# Altium PCB l297_l298.PcbDoc
Units mm, origin at the board's own origin, x right, y up, seen from the top; angles counter-clockwise.
Board outline 152.4 x 101.6 mm, 2 copper layers (Top Layer, Bottom Layer); 23 components, 24 nets, 87 pads, 6 vias.
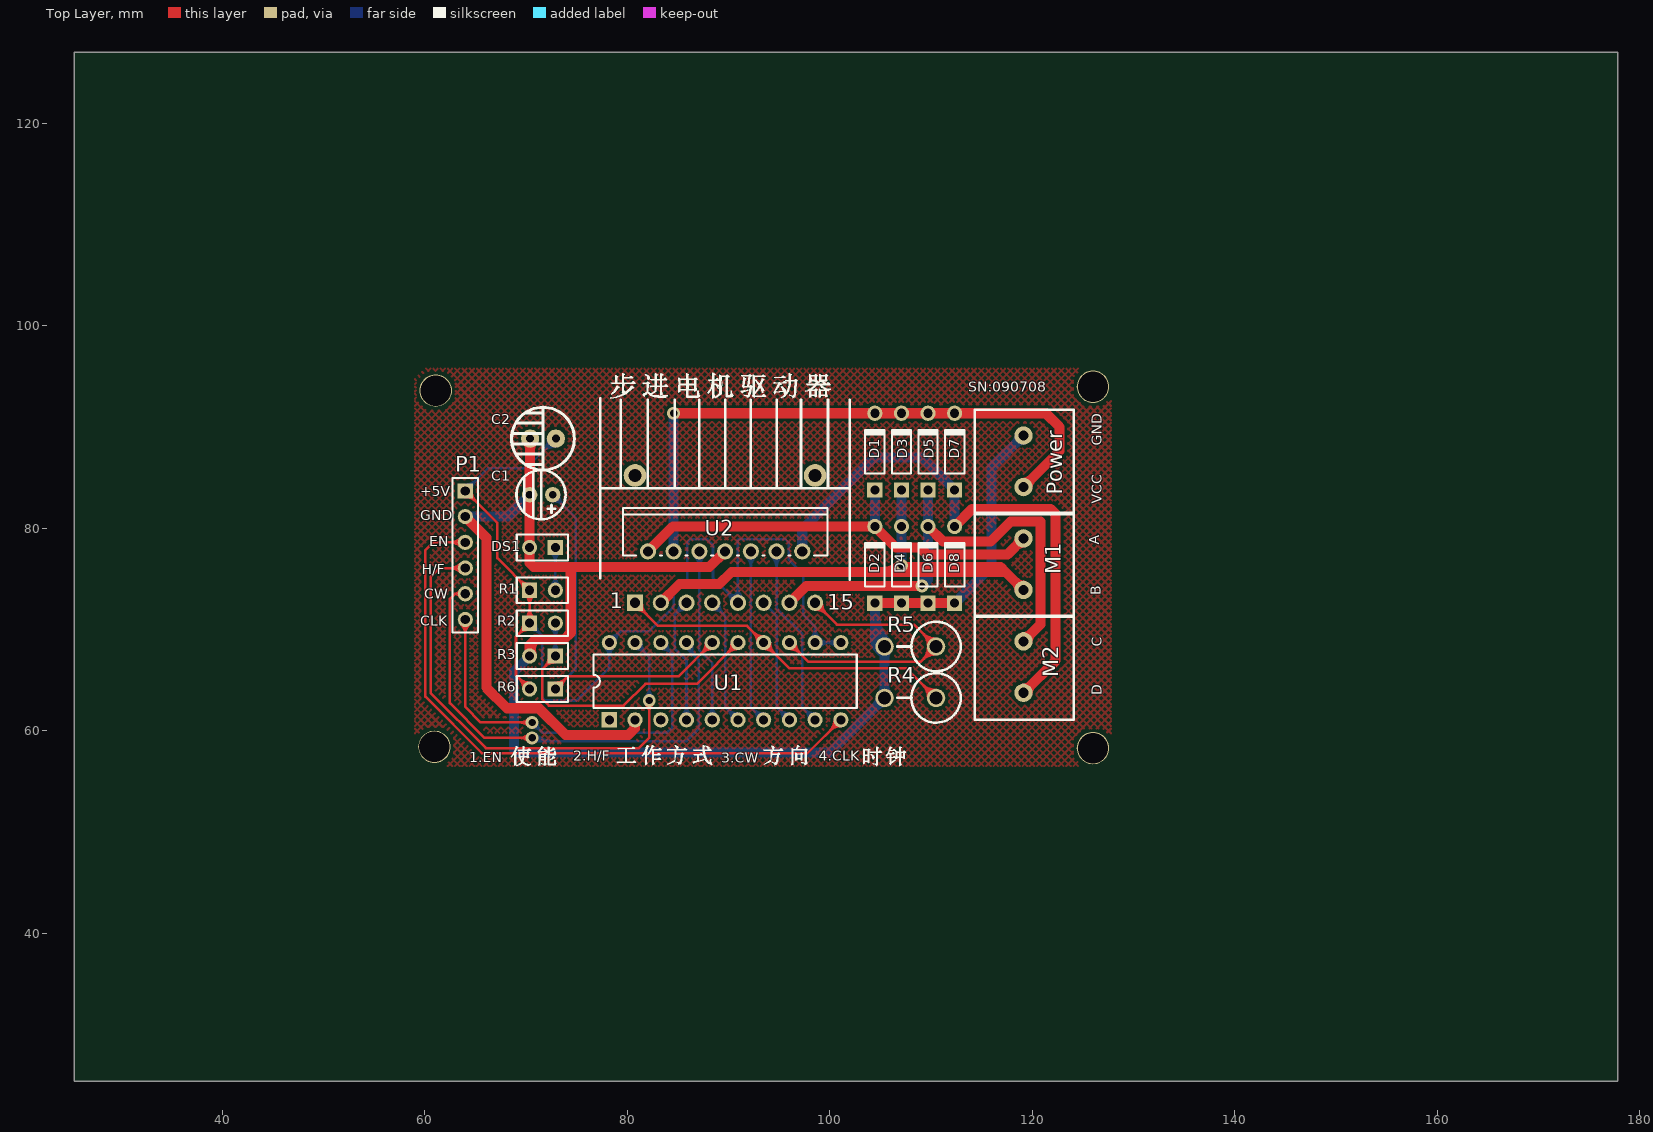
[diagram p0: Top Layer view]
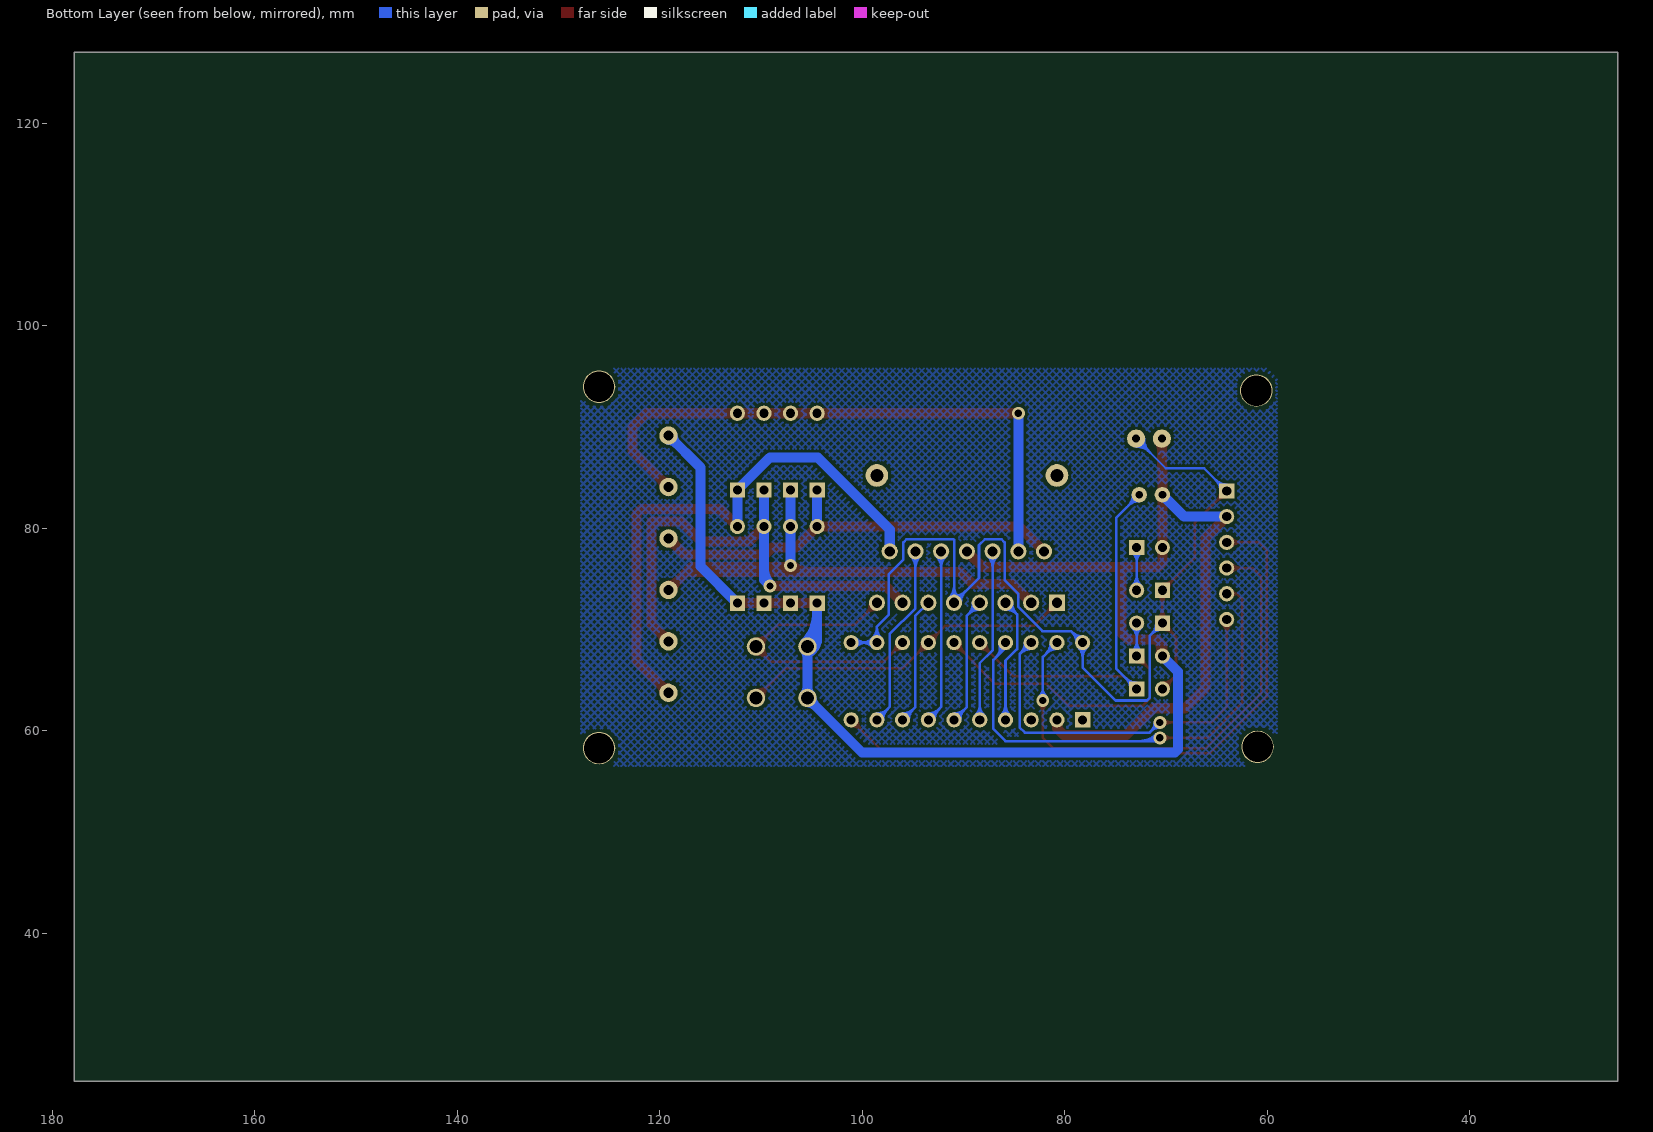
[diagram p1: Bottom Layer view, seen from below]

## Layer stack, top to bottom
Top Layer: signal copper 0.0356
Dielectric: dielectric 0.32, FR-4, Dk 4.8
Bottom Layer: signal copper 0.0356

## Board outline
25.4,25.4 177.8,25.4 177.8,127 25.4,127

## Design rules (kind name [scope] priority, off if disabled: settings)
Clearance [All] p1: gap=0.254
ComponentClearance [All] p1: gap=0.254 collisioncheckmode=3 verticalgap=0.254
PolygonConnect [All] p1: connectstyle=Relief reliefconductorwidth=0.254 reliefentries=4 polygonreliefangle="90 Angle"
RoutingVias [All] p1: holewidth=0.711 width=1.27 viastyle="Through Hole" minholewidth=0.711 minwidth=1.27 maxholewidth=0.711 maxwidth=1.27
SolderMaskExpansion [All] p1: expansion=0.102
TestPointUsage [All] p1: valid=0 allowmultiple=FALSE
Testpoint [All] p1: side=15 testpointundercomponent=TRUE minsize=1.016 maxsize=2.54 preferedsize=1.524 minholesize=0 maxholesize=1.016 preferedholesize=0.813 testpointgrid=0.025 style=1023 order=0123456789
Width NetD7_1 [InNet('NetD7_1')] p1: maxlimit=1 minlimit=1 preferedwidth=1
Width NetD5_1 [InNet('NetD5_1')] p2: maxlimit=1 minlimit=1 preferedwidth=1
Width NetD3_1 [InNet('NetD3_1')] p3: maxlimit=1 minlimit=1 preferedwidth=1
Width NetD1_1 [InNet('NetD1_1')] p4: maxlimit=1 minlimit=1 preferedwidth=1
Width VCC [InNet('VCC')] p5: maxlimit=1 minlimit=1 preferedwidth=1
Width GNE [InNet('GND')] p6: maxlimit=1 minlimit=1 preferedwidth=1
Width [All] p7: maxlimit=0.254 minlimit=0.254 preferedwidth=0.254
17 further rules are at their usual default settings.

## Components (designator, comment, footprint, x,y, rotation, side; value= is the part's Value field where it differs from the comment)
C1 "" C-DJ-4 70.231,85.852 r180 top
C2 "" C-DJ-6 70.358,88.773 r180 top
D1 "1N4007" D-ZL-10 104.394,91.313 r90 top
D2 "1N4007" D-ZL-10 104.394,80.137 r90 top
D3 "1N4007" D-ZL-10 107.022,91.313 r90 top
D4 "1N4007" D-ZL-10 107.022,80.137 r90 top
D5 "1N4007" D-ZL-10 109.649,91.313 r90 top
D6 "1N4007" D-ZL-10 109.649,80.137 r90 top
D7 "1N4007" D-ZL-10 112.277,91.313 r90 top
D8 "1N4007" D-ZL-10 112.277,80.137 r90 top
DS1 "LED" CPDR 71.628,78.105 r180 top
M1 "" JK128_2 120.269,78.486 r0 top
M2 "" JK128_2 120.269,68.326 r0 top
P1 "Header 6" HDR1X6 64.008,83.693 r270 top
Power "" JK128_2 120.269,88.646 r0 top
R1 "Res" CPDR 71.628,73.879 r0 top
R2 "Res" CPDR 71.628,70.631 r0 top
R3 "Res" CPDR 71.628,67.383 r180 top
R4 "" ZCDZl 107.95,60.706 r270 top
R5 "" ZCDZl 107.95,65.786 r270 top
R6 "Res" CPDR 71.628,64.135 r180 top
U1 "L297A" DIP-20 89.662,64.897 r0 top
U2 "L298N" L298N 89.662,77.597 r0 top

## Footprints (in the part's own frame and the unit in brackets; to place one, negate y for a bottom-side part, rotate by r counter-clockwise, add the part's x,y. Pads: shape width x height; smd on the part's side, far side on the other; paste and mask are expansions set on the pad)
C-DJ-4 [mil] "电容4mm"
  round 60 hole 30: 1(-95,100) 2(-5,100)
  silkscreen extent -145,5 46,195
C-DJ-6 [mm] "电容6mm"
  round 1.8 hole 0.8: 1(-2.591,-0.076) 2(-0.051,-0.076)
  silkscreen extent -4.42,-3.18 1.78,3.02
CPDR [mm] "瓷片电容"
  rect 1.5x1.5 hole 0.9: 1(-1.27,0)
  round 1.5 hole 0.9: 2(1.27,0)
  silkscreen extent -2.54,-1.27 2.54,1.27
D-ZL-10 [mm] "整流二极管"
  rect 1.5x1.5 hole 0.9: 1(-7.532,-0.051)
  round 1.5 hole 0.9: 2(0.048,-0.051)
  silkscreen extent -5.89,-1 -1.5,0.9
DIP-20 [mm] "直插20管脚"
  rect 1.5x1.5 hole 0.9: 1(-11.43,-3.81)
  round 1.5 hole 0.9: 2(-8.89,-3.81) 3(-6.35,-3.81) 4(-3.81,-3.81) 5(-1.27,-3.81) 6(1.27,-3.81) 7(3.81,-3.81) 8(6.35,-3.81) 9(8.89,-3.81) 10(11.43,-3.81) 11(11.43,3.81) 12(8.89,3.81) 13(6.35,3.81) 14(3.81,3.81) 15(1.27,3.81) 16(-1.27,3.81) 17(-3.81,3.81) 18(-6.35,3.81) 19(-8.89,3.81) 20(-11.43,3.81)
  silkscreen extent -13,-2.65 13,2.65
HDR1X6 [mm] "Connector; Header; 6 Position"
  rect 1.5x1.5 hole 0.9: 1(0,0)
  round 1.5 hole 0.9: 2(2.54,0) 3(5.08,0) 4(7.62,0) 5(10.16,0) 6(12.7,0)
  silkscreen extent -1.27,-1.27 13.97,1.27
JK128_2 [mil] "接线端子"
  round 71.81 hole 39.37: 1(-45,20) 2(-45,-180)
  silkscreen extent -235,-285 150,120
L298N [mm] "直流/步进两用驱动器"
  round 2.24 hole 1.262: 0(-8.89,7.62) 0(8.89,7.62)
  rect 1.6x1.6 hole 1: 1(-8.89,-4.953)
  round 1.6 hole 1: 2(-7.62,0.127) 3(-6.35,-4.953) 4(-5.08,0.127) 5(-3.81,-4.953) 6(-2.54,0.127) 7(-1.27,-4.953) 8(0,0.127) 9(1.27,-4.953) 10(2.54,0.127) 11(3.81,-4.953) 12(5.08,0.127) 13(6.35,-4.953) 14(7.62,0.127) 15(8.89,-4.953)
  silkscreen extent -12.32,-2.67 12.32,15.24
ZCDZl [mm] "直插电阻立式插"
  round 1.824 hole 1.262: 1(-2.54,2.54) 2(-2.54,-2.54)
  silkscreen extent -4.98,-1.27 -0.1,4.98

## Part data
C1: library part Cap, "Capacitor"
C2: library part "Cap Pol3", "Polarized Capacitor (Surface Mount)"
D1 D2 D3 D4 D5 D6 D7 D8: library part "Diode 1N4007", "1 Amp General Purpose Rectifier"
DS1: "发光二极管"
M1 M2 Power: library part MHDR1X2, "Header, 2-Pin"
P1: "Header, 6-Pin"
R1 R2 R3 R6: "电阻"
R4 R5: library part Res, "电阻"
U1: "Stepper Motor Controller"
U2: "Dual Full Bridge Driver"

## Free pads (board coordinates)
  round 3.2 hole 3: 0(61.087,93.599) 1(60.96,58.42) 2(125.984,58.293) 3(125.984,93.98)

## Via types
v1: diameter 1.27, hole 0.711, Top Layer to Bottom Layer, 6 vias

## Nets (pads, with @x,y where several pads share a name; then routed paths per layer and width w, separated by ;. In a path a pad name is that pad's centre, name@x,y a point inside that pad or via, vN(x,y) a via of type N, cw(c..) or ccw(c..) an arc to the next point about the centre after c; other vN are vias at no path point)
ENA: R4.1 U1.14 U2.1 | length 50.3
  Top Layer w0.254: U2.1@80.772,71.971 cw(c80.772,70.346) 81.921,71.495 cw(c83.07,72.644) U2.1@81.445,72.644 ; U2.1@80.772,72.225 cw(c80.772,71.213) 81.487,71.929 cw(c82.203,72.644) U2.1@81.191,72.644 ; U2.1 83.058,70.358 91.821,70.358 U1.14 96.012,66.167 107.569,66.167 R4.1 ; U1.14@92.849,68.707 ccw(c91.345,68.707) 92.408,69.771 ccw(c93.472,70.834) U1.14@93.472,69.33 ; U1.14@93.103,68.707 ccw(c92.212,68.707) 92.842,69.337 ccw(c93.472,69.967) U1.14@93.472,69.076 ; U1.14@93.472,68.084 cw(c93.472,66.58) 94.536,67.643 cw(c95.599,68.707) U1.14@94.095,68.707 ; U1.14@93.472,68.338 cw(c93.472,67.447) 94.102,68.077 cw(c94.732,68.707) U1.14@93.841,68.707 ; R4.1@109.705,63.246 ccw(c107.81,63.246) 109.15,64.586 ccw(c110.49,65.926) R4.1@110.49,64.031 ; R4.1@109.959,63.246 ccw(c108.677,63.246) 109.584,64.152 ccw(c110.49,65.059) R4.1@110.49,63.777
ENB: R5.1 U1.13 U2.15 | length 47.5
  Top Layer w0.254: U1.13@96.012,68.084 cw(c96.012,66.58) 97.076,67.643 cw(c98.139,68.707) U1.13@96.635,68.707 ; U1.13@96.012,68.338 cw(c96.012,67.447) 96.642,68.077 cw(c97.272,68.707) U1.13@96.381,68.707 ; U1.13 97.917,66.802 108.966,66.802 R5.1 108.331,70.485 100.711,70.485 U2.15 ; U2.15@98.552,71.971 cw(c98.552,70.346) 99.701,71.495 cw(c100.85,72.644) U2.15@99.225,72.644 ; U2.15@98.552,72.225 cw(c98.552,71.213) 99.267,71.929 cw(c99.983,72.644) U2.15@98.971,72.644 ; R5.1@110.49,67.541 ccw(c110.49,65.646) 109.15,66.986 ccw(c107.81,68.326) 109.705,68.326 ccw(c107.81,68.326) 109.15,69.666 ccw(c110.49,71.006) R5.1@110.49,69.111 ; R5.1@110.49,67.795 ccw(c110.49,66.513) 109.584,67.42 ccw(c108.677,68.326) 109.959,68.326 ccw(c108.677,68.326) 109.584,69.232 ccw(c110.49,70.139) R5.1@110.49,68.857
GND: C1.2 C2.2 D2.1 D4.1 D6.1 D8.1 DS1.2 P1.2 Power.1 R3.2 R4.2 R5.2 U1.2 U2.8 | length 189.9
  Top Layer w1: P1.2 66.091,79.07 66.091,64.262 68.123,62.23 71.271,62.23 73.918,59.583 80.106,59.583 80.772,60.249 U1.2 ; C2.2@70.126,88.566 cw(c69.443,87.884) 70.409,87.884 cw(c71.374,87.884) C2.2@70.692,88.566 ; R3.2 70.358,68.478 70.891,69.012 ; C2.2 70.409,86.106 70.358,86.055 C1.2 DS1.2 70.358,76.581 70.769,76.17 88.108,76.17 U2.8 ; R3.2@70.589,67.479 cw(c71.883,68.02) 70.891,69.012 ; 74.422,76.17 74.422,69.672 73.762,69.012 70.891,69.012 ; 80.525,60.002 ccw(c80.032,60.495) U1.2@80.577,60.931 ; D2.1 D4.1 D6.1 D8.1
  Bottom Layer w1: P1.2 68.199,81.153 C1.2 ; R3.2 68.834,65.859 68.834,58.16 69.133,57.861 100.025,57.861 R4.2 R5.2 104.445,69.291 D2.1 ; 104.445,69.235 ccw(c106.319,69.235) R5.2@104.994,67.91 ; 104.445,71.65 ccw(c108.734,71.65) R5.2@105.701,68.617 ; R4.2@104.998,63.246 cw(c104.003,63.246) 104.707,62.543 cw(c105.41,61.839) R4.2@105.41,62.834 ; R5.2@104.998,68.326 ccw(c104.003,68.326) 104.707,69.029 ccw(c105.41,69.733) R5.2@105.41,68.738 ; R4.2@105.119,63.537 ccw(c104.415,64.241) 105.41,64.241 ccw(c106.405,64.241) R4.2@105.701,63.537 ; R5.2@105.119,68.035 cw(c104.415,67.331) 105.41,67.331 cw(c106.405,67.331) R5.2@105.701,68.035 ; D8.1 115.951,76.228 115.951,85.979 Power.1 ; Power.1@118.714,89.154 cw(c117.719,89.154) 118.423,88.451 cw(c119.126,87.747) Power.1@119.126,88.742
HOME: U1.3
NetC1_1: C1.1 R6.1 U1.16 | length 53.5
  Top Layer w0.254: R6.1 74.168,65.405 85.09,65.405 U1.16 ; R6.1@72.898,64.504 ccw(c72.898,65.395) 73.528,64.765 ccw(c74.158,64.135) R6.1@73.267,64.135 ; R6.1@72.898,64.758 ccw(c72.898,66.262) 73.962,65.199 ccw(c75.025,64.135) R6.1@73.521,64.135 ; U1.16@87.769,68.707 cw(c86.265,68.707) 87.328,67.643 cw(c88.392,66.58) U1.16@88.392,68.084 ; U1.16@88.023,68.707 cw(c87.132,68.707) 87.762,68.077 cw(c88.392,67.447) U1.16@88.392,68.338
  Bottom Layer w0.254: C1.1@72.644,82.677 cw(c72.644,81.144) 73.728,82.228 cw(c74.812,83.312) C1.1@73.279,83.312 ; C1.1@72.644,82.931 cw(c72.644,82.011) 73.294,82.662 cw(c73.945,83.312) C1.1@73.025,83.312 ; C1.1 74.93,81.026 74.93,66.167 R6.1 ; R6.1@72.898,64.504 ccw(c72.898,65.395) 73.528,64.765 ccw(c74.158,64.135) R6.1@73.267,64.135 ; R6.1@72.898,64.758 ccw(c72.898,66.262) 73.962,65.199 ccw(c75.025,64.135) R6.1@73.521,64.135
NetD1_1: D1.1 D2.2 M1.1 U2.2 | length 45.1
  Top Layer w1: U2.2 84.503,80.185 D2.2 106.526,78.105 108.897,78.105 109.575,77.427 117.559,77.427 M1.1 ; M1.1@118.714,78.994 cw(c117.719,78.994) 118.423,78.291 cw(c119.126,77.587) M1.1@119.126,78.582
  Bottom Layer w1: D2.2 D1.1
NetD3_1: D3.1 D4.2 M1.2 U2.3 | length 61.9
  Top Layer w1: U2.3 85.161,74.493 89.097,74.493 90.296,75.692 107.073,75.692 117.348,75.692 ; 105.243,75.692 ccw(c105.243,78.145) v1@106.978,76.41 ; v1(107.073,76.315) 107.215,76.173 116.867,76.173 117.348,75.692 ; 107.741,76.173 cw(c107.741,76.983) 107.168,76.41 ccw(c108.903,78.145) 108.903,75.692 ; M1.2@118.714,73.914 ccw(c117.719,73.914) 118.423,74.617 ccw(c119.126,75.321) M1.2@119.126,74.326 ; M1.2 117.348,75.692
  Bottom Layer w1: v1(107.073,76.315) D4.2 D3.1
NetD5_1: D5.1 D6.2 M2.1 U2.13 | length 52
  Top Layer w1: U2.13 97.663,74.295 v1(109.093,74.295) ; D6.2 111.205,78.681 115.868,78.681 117.847,80.66 120.792,80.66 120.802,80.65 120.802,70.51 M2.1 ; M2.1@119.126,69.246 ccw(c119.126,70.241) 119.829,69.537 ccw(c120.533,68.834) M2.1@119.538,68.834
  Bottom Layer w1: v1@108.998,74.39 ccw(c107.3,76.088) 109.701,76.088 ; v1(109.093,74.295) 109.701,74.903 D6.2 D5.1
NetD7_1: D7.1 D8.2 M2.2 U2.14 | length 56.5
  Top Layer w1: D8.2 114.057,81.914 121.794,81.914 122.301,81.407 122.301,66.929 M2.2 ; M2.2@119.126,64.166 ccw(c119.126,65.161) 119.829,64.457 ccw(c120.533,63.754) M2.2@119.538,63.754
  Bottom Layer w1: U2.14 97.282,79.883 104.394,86.995 109.114,86.995 D7.1 D8.2
NetDS1_1: DS1.1 R1.2 | length 11.7
  Bottom Layer w0.254: R1.2@72.457,74.32 ccw(c71.394,75.383) 72.898,75.383 ccw(c74.402,75.383) R1.2@73.339,74.32 ; DS1.1@72.457,77.664 cw(c71.394,76.601) 72.898,76.601 cw(c74.402,76.601) DS1.1@73.339,77.664 ; R1.2@72.637,74.14 ccw(c72.007,74.77) 72.898,74.77 ccw(c73.789,74.77) R1.2@73.159,74.14 ; DS1.1@72.637,77.844 cw(c72.007,77.214) 72.898,77.214 cw(c73.789,77.214) DS1.1@73.159,77.844 ; R1.2 DS1.1
NetR2_2: R2.2 R3.1 U1.15 | length 45.2
  Top Layer w0.254: R3.1@72.275,67.383 cw(c70.771,67.383) 71.834,66.319 cw(c72.898,65.256) R3.1@72.898,66.76 ; R3.1@72.529,67.383 cw(c71.638,67.383) 72.268,66.753 cw(c72.898,66.123) R3.1@72.898,67.014 ; R3.1 71.628,66.113 71.628,63.119 72.263,62.484 79.629,62.484 81.788,64.643 86.868,64.643 U1.15 ; U1.15@90.309,68.707 cw(c88.805,68.707) 89.868,67.643 cw(c90.932,66.58) U1.15@90.932,68.084 ; U1.15@90.563,68.707 cw(c89.672,68.707) 90.302,68.077 cw(c90.932,67.447) U1.15@90.932,68.338
  Bottom Layer w0.254: R3.1@72.457,67.824 ccw(c71.394,68.887) 72.898,68.887 ccw(c74.402,68.887) R3.1@73.339,67.824 ; R2.2@72.457,70.19 cw(c71.394,69.127) 72.898,69.127 cw(c74.402,69.127) R2.2@73.339,70.19 ; R3.1@72.637,67.644 ccw(c72.007,68.274) 72.898,68.274 ccw(c73.789,68.274) R3.1@73.159,67.644 ; R2.2@72.637,70.37 cw(c72.007,69.74) 72.898,69.74 cw(c73.789,69.74) R2.2@73.159,70.37 ; R3.1 R2.2
NetU1_4: U1.4 U2.5 | length 20.4
  Bottom Layer w0.254: U2.5@85.179,72.642 cw(c83.574,72.636) 84.709,71.501 ; U1.4@85.411,61.528 ccw(c84.348,62.591) 85.852,62.591 ccw(c87.356,62.591) U1.4@86.293,61.528 ; U2.5@85.433,72.642 cw(c84.434,72.639) 85.14,71.932 cw(c85.847,71.226) U2.5@85.85,72.225 ; U1.4@85.591,61.348 ccw(c84.961,61.978) 85.852,61.978 ccw(c86.743,61.978) U1.4@86.113,61.348 ; U2.5@85.85,71.971 ccw(c85.844,70.366) 84.709,71.501 ; U1.4 85.852,66.929 84.709,68.072 84.709,71.501 ; U2.5 84.709,71.501
NetU1_5: U1.5 U2.6 | length 25.1
  Bottom Layer w0.254: U2.6@86.646,77.248 cw(c85.497,76.099) 87.122,76.099 cw(c88.747,76.099) U2.6@87.598,77.248 ; U2.6@86.826,77.428 cw(c86.11,76.712) 87.122,76.712 cw(c88.134,76.712) U2.6@87.418,77.428 ; U2.6 87.122,67.945 88.392,66.675 U1.5 ; U1.5@87.951,61.528 ccw(c86.888,62.591) 88.392,62.591 ccw(c89.896,62.591) U1.5@88.833,61.528 ; U1.5@88.131,61.348 ccw(c87.501,61.978) 88.392,61.978 ccw(c89.283,61.978) U1.5@88.653,61.348
NetU1_6: U1.6 U2.7 | length 20.5
  Bottom Layer w0.254: U2.7@88.392,71.971 cw(c88.392,70.346) 89.541,71.495 cw(c90.69,72.644) U2.7@89.065,72.644 ; U2.7@88.392,72.225 cw(c88.392,71.213) 89.107,71.929 cw(c89.823,72.644) U2.7@88.811,72.644 ; U2.7 89.662,71.374 89.662,62.357 U1.6 ; U1.6@90.309,61.087 ccw(c88.805,61.087) 89.868,62.151 ccw(c90.932,63.214) U1.6@90.932,61.71 ; U1.6@90.563,61.087 ccw(c89.672,61.087) 90.302,61.717 ccw(c90.932,62.347) U1.6@90.932,61.456
NetU1_7: U1.7 U2.10 | length 25.1
  Bottom Layer w0.254: U2.10@91.726,77.248 cw(c90.577,76.099) 92.202,76.099 cw(c93.827,76.099) U2.10@92.678,77.248 ; U2.10@91.906,77.428 cw(c91.19,76.712) 92.202,76.712 cw(c93.214,76.712) U2.10@92.498,77.428 ; U2.10 92.202,62.357 U1.7 ; U1.7@92.849,61.087 ccw(c91.345,61.087) 92.408,62.151 ccw(c93.472,63.214) U1.7@93.472,61.71 ; U1.7@93.103,61.087 ccw(c92.212,61.087) 92.842,61.717 ccw(c93.472,62.347) U1.7@93.472,61.456
NetU1_8: U1.8 U2.11 | length 16.4
  Bottom Layer w0.254: U2.11 94.742,71.374 94.742,62.357 U1.8 ; U1.8@95.389,61.087 ccw(c93.885,61.087) 94.948,62.151 ccw(c96.012,63.214) U1.8@96.012,61.71 ; U1.8@95.643,61.087 ccw(c94.752,61.087) 95.382,61.717 ccw(c96.012,62.347) U1.8@96.012,61.456
NetU1_9: U1.9 U2.12 | length 26.1
  Bottom Layer w0.254: U2.12@94.266,77.248 cw(c93.117,76.099) 94.742,76.099 cw(c96.367,76.099) U2.12@95.218,77.248 ; U2.12@94.446,77.428 cw(c93.73,76.712) 94.742,76.712 cw(c95.754,76.712) U2.12@95.038,77.428 ; U2.12 94.742,72.098 97.282,69.558 97.282,62.357 U1.9 ; U1.9@97.929,61.087 ccw(c96.425,61.087) 97.488,62.151 ccw(c98.552,63.214) U1.9@98.552,61.71 ; U1.9@98.183,61.087 ccw(c97.292,61.087) 97.922,61.717 ccw(c98.552,62.347) U1.9@98.552,61.456
VCC: D1.2 D3.2 D5.2 D7.2 Power.2 U2.4 | length 61.3
  Top Layer w1: v1(84.582,91.361) D1.2 D3.2 D5.2 D7.2 121.333,91.361 122.682,90.012 122.682,87.63 Power.2 ; Power.2@119.126,84.486 ccw(c119.126,85.481) 119.829,84.777 ccw(c120.533,84.074) Power.2@119.538,84.074
  Bottom Layer w1: U2.4 v1(84.582,91.361)
使能: P1.3 U1.10 | length 71
  Top Layer w0.254: P1.3@63.567,78.172 ccw(c62.504,77.109) 62.504,78.613 ccw(c62.504,80.117) P1.3@63.567,79.054 ; P1.3@63.747,78.352 ccw(c63.117,77.722) 63.117,78.613 ccw(c63.117,79.504) P1.3@63.747,78.874 ; P1.3 60.833,78.613 60.071,77.851 60.071,63.373 65.659,57.785 97.79,57.785 U1.10 ; U1.10@100.469,61.087 cw(c98.965,61.087) 100.028,60.023 cw(c101.092,58.96) U1.10@101.092,60.464 ; U1.10@100.723,61.087 cw(c99.832,61.087) 100.462,60.457 cw(c101.092,59.827) U1.10@101.092,60.718
复位: C2.1 P1.1 R1.1 R2.1 R6.2 U1.11 U1.12 U1.20 U2.9 | length 164.1
  Top Layer w0.254: P1.1@64.008,83.07 cw(c64.008,81.566) 65.072,82.629 cw(c66.135,83.693) P1.1@64.631,83.693 ; P1.1@64.008,83.324 cw(c64.008,82.433) 64.638,83.063 cw(c65.268,83.693) P1.1@64.377,83.693 ; P1.1 67.183,80.518 67.183,77.054 R1.1 R2.1 69.012,69.285 69.012,65.481 R6.2 ; R6.2@69.735,64.135 ccw(c68.231,64.135) 69.294,65.199 ccw(c70.358,66.262) R6.2@70.358,64.758 ; R2.1@69.735,70.631 cw(c68.231,70.631) 69.294,69.567 cw(c70.358,68.504) R2.1@70.358,70.008 ; R1.1@69.735,73.879 ccw(c68.231,73.879) 69.294,74.943 ccw(c70.358,76.006) R1.1@70.358,74.502 ; R2.1@69.917,71.072 ccw(c68.854,72.135) 70.358,72.135 ccw(c71.862,72.135) R2.1@70.799,71.072 ; R1.1@69.917,73.438 cw(c68.854,72.375) 70.358,72.375 cw(c71.862,72.375) R1.1@70.799,73.438 ; R6.2@69.989,64.135 ccw(c69.098,64.135) 69.728,64.765 ccw(c70.358,65.395) R6.2@70.358,64.504 ; R2.1@69.989,70.631 cw(c69.098,70.631) 69.728,70.001 cw(c70.358,69.371) R2.1@70.358,70.262 ; R1.1@69.989,73.879 ccw(c69.098,73.879) 69.728,74.509 ccw(c70.358,75.139) R1.1@70.358,74.248 ; R2.1@70.097,70.892 ccw(c69.467,71.522) 70.358,71.522 ccw(c71.249,71.522) R2.1@70.619,70.892 ; R1.1@70.097,73.618 cw(c69.467,72.988) 70.358,72.988 cw(c71.249,72.988) R1.1@70.619,73.618
  Bottom Layer w0.254: P1.1 66.243,85.928 70.028,85.928 C2.1 ; P1.1@64.008,84.062 ccw(c64.008,84.953) 64.638,84.323 ccw(c65.268,83.693) P1.1@64.377,83.693 ; P1.1@64.008,84.316 ccw(c64.008,85.82) 65.072,84.757 ccw(c66.135,83.693) P1.1@64.631,83.693 ; R2.1@70.358,70.008 cw(c70.358,68.504) 71.422,69.567 cw(c72.485,70.631) R2.1@70.981,70.631 ; R2.1@70.358,70.262 cw(c70.358,69.371) 70.988,70.001 cw(c71.618,70.631) R2.1@70.727,70.631 ; R2.1 71.628,69.361 71.628,63.246 71.882,62.992 74.981,62.992 78.232,66.243 U1.20 79.375,69.85 82.194,69.85 84.582,72.238 84.582,73.533 85.928,74.879 85.928,78.613 86.233,78.918 87.884,78.918 88.468,78.334 88.468,75.108 U2.9 90.932,78.842 91.008,78.918 95.631,78.918 95.936,78.613 95.936,76.911 97.371,75.476 97.371,71.476 98.552,70.295 U1.12 U1.11 ; C2.1@72.176,88.849 cw(c70.31,88.849) 71.629,87.53 cw(c72.949,86.21) C2.1@72.949,88.076 ; C2.1@72.43,88.849 cw(c71.177,88.849) 72.063,87.963 cw(c72.949,87.077) C2.1@72.949,88.33 ; U1.20@77.791,68.266 cw(c76.728,67.203) 78.232,67.203 cw(c79.736,67.203) U1.20@78.673,68.266 ; U1.20@77.971,68.446 cw(c77.341,67.816) 78.232,67.816 cw(c79.123,67.816) U1.20@78.493,68.446 ; U1.20@78.232,69.076 ccw(c78.232,69.967) 78.862,69.337 ccw(c79.492,68.707) U1.20@78.601,68.707 ; U1.20@78.232,69.33 ccw(c78.232,70.834) 79.296,69.771 ccw(c80.359,68.707) U1.20@78.855,68.707 ; U2.9@90.259,72.644 ccw(c88.634,72.644) 89.783,73.793 ccw(c90.932,74.942) U2.9@90.932,73.317 ; U2.9@90.456,73.12 ccw(c89.307,74.269) 90.932,74.269 ccw(c92.557,74.269) U2.9@91.408,73.12 ; U2.9@90.513,72.644 ccw(c89.501,72.644) 90.217,73.359 ccw(c90.932,74.075) U2.9@90.932,73.063 ; U2.9@90.636,72.94 ccw(c89.92,73.656) 90.932,73.656 ccw(c91.944,73.656) U2.9@91.228,72.94 ; U1.12@98.111,69.148 ccw(c97.048,70.211) 98.552,70.211 ccw(c100.056,70.211) 98.993,69.148 ccw(c100.056,70.211) 100.056,68.707 ccw(c100.056,67.203) U1.12@98.993,68.266 ; U1.12@98.291,68.968 ccw(c97.661,69.598) 98.552,69.598 ccw(c99.443,69.598) 98.813,68.968 ccw(c99.443,69.598) 99.443,68.707 ccw(c99.443,67.816) U1.12@98.813,68.446 ; U1.11@100.651,68.266 ccw(c99.588,67.203) 99.588,68.707 ccw(c99.588,70.211) U1.11@100.651,69.148 ; U1.11@100.831,68.446 ccw(c100.201,67.816) 100.201,68.707 ccw(c100.201,69.598) U1.11@100.831,68.968
工作方式: P1.4 U1.19 | length 61
  Top Layer w0.254: P1.4@63.567,75.632 ccw(c62.504,74.569) 62.504,76.073 ccw(c62.504,77.577) P1.4@63.567,76.514 ; P1.4@63.747,75.812 ccw(c63.117,75.182) 63.117,76.073 ccw(c63.117,76.964) P1.4@63.747,76.334 ; P1.4 61.468,76.073 60.579,75.184 60.579,63.754 66.04,58.293 ; 66.167,58.293 66.04,58.293 ; v1@81.81,62.633 cw(c80.943,61.766) 82.169,61.766 cw(c83.395,61.766) v1@82.528,62.633 ; v1(82.169,62.992) 82.169,59.309 81.153,58.293 66.04,58.293
  Bottom Layer w0.254: U1.19@80.772,68.084 cw(c80.772,66.58) 81.836,67.643 cw(c82.899,68.707) U1.19@81.395,68.707 ; U1.19@80.772,68.338 cw(c80.772,67.447) 81.402,68.077 cw(c82.032,68.707) U1.19@81.141,68.707 ; U1.19 82.169,67.31 v1(82.169,62.992) ; v1@81.81,63.351 ccw(c80.943,64.218) 82.169,64.218 ccw(c83.395,64.218) v1@82.528,63.351
方向: P1.5 U1.17 | length 58.2
  Top Layer w0.254: P1.5@63.453,73.25 ccw(c62.992,73.016) 62.992,73.533 ; P1.5@63.453,73.816 cw(c62.992,74.05) 62.992,73.533 ; P1.5 62.992,73.533 ; v1@70.253,58.95 ccw(c69.386,58.083) 69.386,59.309 ccw(c69.386,60.535) v1@70.253,59.668 ; v1(70.612,59.309) 65.913,59.309 62.484,62.738 62.484,73.025 62.992,73.533
  Bottom Layer w0.254: v1@70.792,59.489 ccw(c71.997,60.694) 71.997,58.989 ; v1@70.971,59.668 ccw(c72.61,61.307) 72.61,58.989 ; 71.384,58.989 cw(c71.384,60.081) v1(70.612,59.309) 70.612,59.243 70.866,58.989 85.852,58.989 87.056,60.194 87.056,66.995 85.852,68.199 U1.17 ; U1.17@85.963,68.677 ccw(c86.77,68.462) 86.179,67.872 ; U1.17@86.209,68.612 ccw(c87.261,68.331) 86.491,67.56 ; U1.17@86.454,68.546 ccw(c87.753,68.199) 86.802,67.249
时钟: P1.6 U1.18 | length 50.6
  Top Layer w0.254: P1.6@63.567,70.552 cw(c62.504,69.489) 64.008,69.489 cw(c65.512,69.489) P1.6@64.449,70.552 ; P1.6@63.747,70.732 cw(c63.117,70.102) 64.008,70.102 cw(c64.899,70.102) P1.6@64.269,70.732 ; P1.6 64.008,62.357 65.532,60.833 v1(70.612,60.833) ; v1@70.253,60.474 ccw(c69.386,59.607) 69.386,60.833 ccw(c69.386,62.059) v1@70.253,61.192
  Bottom Layer w0.254: v1@70.612,60.325 cw(c70.612,59.099) 71.479,59.966 cw(c72.346,60.833) v1@71.12,60.833 ; v1(70.612,60.833) 71.628,59.817 83.947,59.817 84.455,60.325 84.455,67.564 U1.18 ; U1.18@83.312,68.084 cw(c83.312,66.58) 84.376,67.643 cw(c85.439,68.707) U1.18@83.935,68.707 ; U1.18@83.312,68.338 cw(c83.312,67.447) 83.942,68.077 cw(c84.572,68.707) U1.18@83.681,68.707
时钟输出: U1.1
pads on no net: U2.0

## Polygon pours and split planes (outlines as drawn)
no net on Top Layer (hatched 45Degree grid 0.508 track 0.203): 59.024,94.749 60.037,95.758 127.002,95.758 127.762,95.001 127.762,57.524 126.749,56.515 60.037,56.515 59.151,57.398 59.024,57.524
no net on Bottom Layer (hatched 45Degree grid 0.508 track 0.203): 59.055,94.745 60.071,95.758 127,95.758 127.762,94.998 127.762,57.528 126.746,56.515 60.198,56.515 59.055,57.654

## Silkscreen, mask and mechanical layers (free items; w line width, h text height)
Top Overlay:
  drawing of 2409 lines, arcs and shapes, not listed
  text "SN:090708" at 113.665,93.472 h1.02
  text "GND" at 126.873,88.138 h1.02 r90
  text "+5V" at 59.563,83.185 h1.02
  text "VCC" at 126.873,82.423 h1.02 r90
  text "GND" at 59.563,80.772 h1.02
  text "A" at 126.619,78.359 h1.02 r90
  text "EN" at 60.452,78.232 h1.02
  text "H/F" at 59.69,75.438 h1.02
  text "B" at 126.746,73.406 h1.02 r90
  text "CW" at 59.944,73.025 h1.02
  text "CLK" at 59.563,70.358 h1.02
  text "C" at 126.873,68.326 h1.02 r90
  text "D" at 126.873,63.5 h1.02 r90
  text "2.H/F" at 74.676,57.023 h1.02
  text "4.CLK" at 98.933,57.023 h1.02
  text "1.EN" at 64.389,56.921 h1.02
  text "3.CW" at 89.291,56.871 h1.02
Mechanical 1:
  lines w0.254: 63.5,96.266 127.254,96.266 128.27,95.25 128.27,57.15 127.127,56.007 59.69,56.007 58.547,57.15 58.547,95.123 59.69,96.266 64.008,96.266

## Text inside footprints (layer, text, board x,y; h text height)
U2: Top Overlay "15" at 99.745,71.935 h1.5; Top Overlay "1" at 78.283,72.106 h1.5